# Altium PCB MasterBoard.PcbDoc (part 3 of 3)
Units mil, origin at the board's own origin, x right, y up, seen from the top; angles counter-clockwise.
Board outline 13400 x 7290 mil, 2 copper layers (Top Layer, Bottom Layer); 563 components, 331 nets, 1403 pads, 323 vias.
Unrouted connection lines stored in the file: 87.
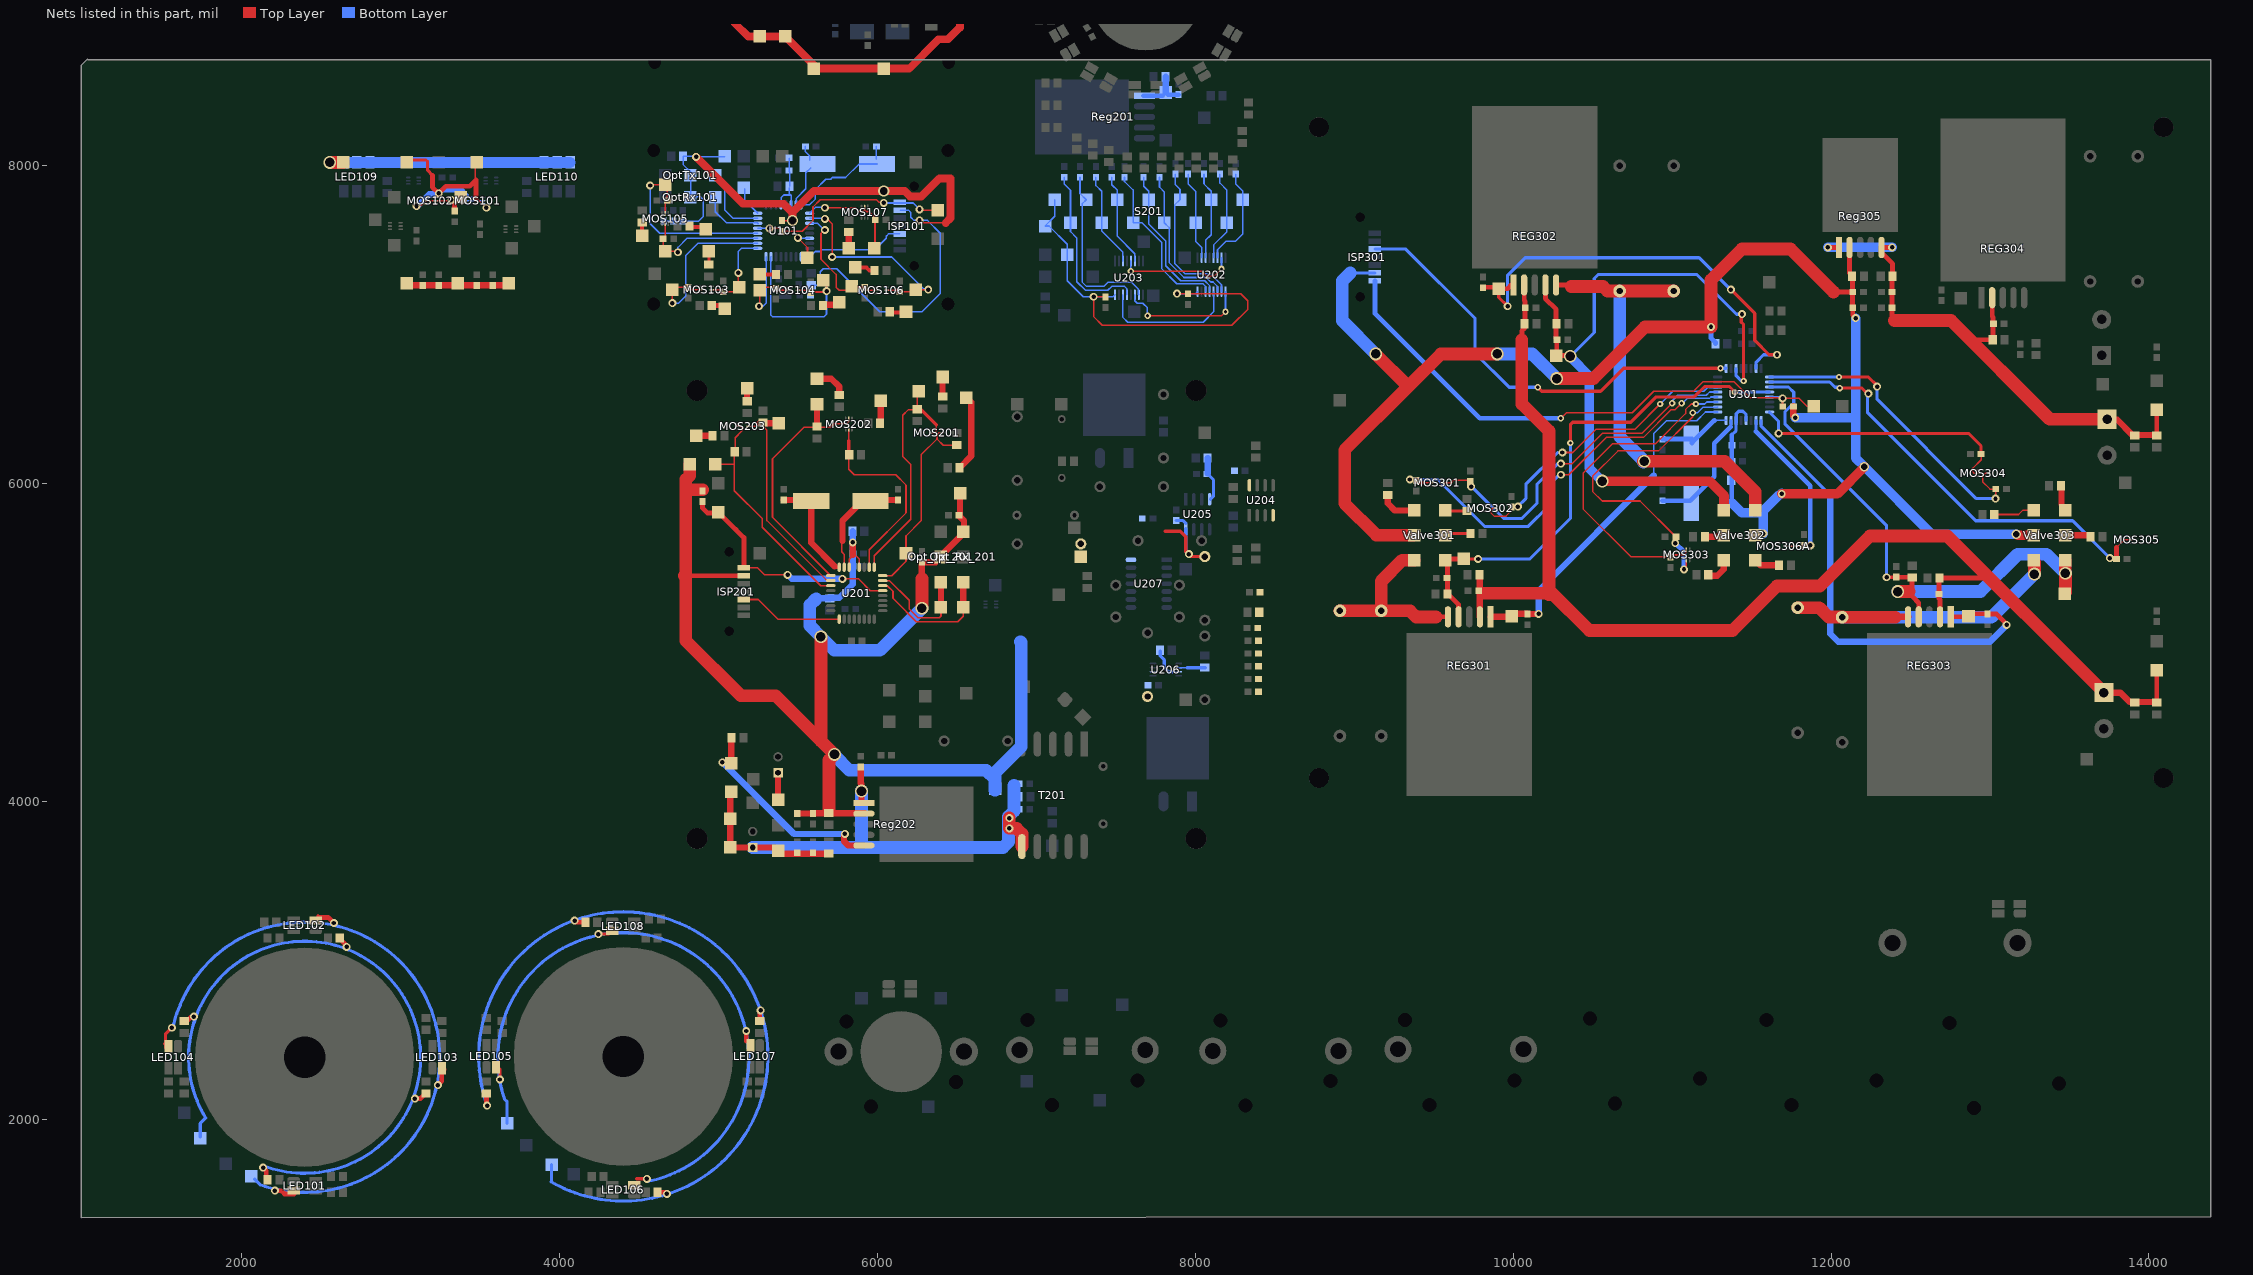
[diagram p3: the nets of this part, all layers, seen from the top]

## Via types
v1: diameter 50, hole 28, Top Layer to Bottom Layer, 217 vias
v2: diameter 80, hole 60, Top Layer to Bottom Layer, 55 vias
v3: diameter 40, hole 20, Top Layer to Bottom Layer, 25 vias
v4: diameter 70, hole 50, Top Layer to Bottom Layer, 11 vias
v5: diameter 145, hole 125, Top Layer to Bottom Layer, 8 vias
v6: diameter 80, hole 40, Top Layer to Bottom Layer, 2 vias
v7: diameter 60, hole 40, Top Layer to Bottom Layer, 2 vias
v8: diameter 50, hole 28, Top Layer to Bottom Layer, tented top, 1 vias
v9: diameter 100, hole 80, Top Layer to Bottom Layer, 1 vias
v10: diameter 100, hole 60, Top Layer to Bottom Layer, 1 vias

## Nets (pads, with @x,y where several pads share a name; then routed paths per layer and width w, separated by ;. In a path a pad name is that pad's centre, name@x,y a point inside that pad or via, vN(x,y) a via of type N, cw(c..) or ccw(c..) an arc to the next point about the centre after c; other vN are vias at no path point) (continued)
NetU202_7: U202.7 U203.5 | length 736.1
  Top Layer w10: v3(7595,7335) 8040,7335 8070,7305 8120,7305 v3(8165,7350)
  Bottom Layer w10: v3(7595,7335) U203.5@7595,7400 ; v3(8165,7350) U202.7@8165,7420
NetU202_9: U202.9 U203.11 | length 813.1
  Top Layer w10: v3(7700,7055) 8165,7055 v3(8190,7080)
  Bottom Layer w10: U203.11@7620,7187.4 7620,7150 7635.63,7134.37 7669.37,7134.37 7698.74,7105 7698.74,7056.26 v3(7700,7055) ; v3(8190,7080) U202.9@8190,7207.4
NetU202_12: U202.12 U203.14 | length 879.2
  Bottom Layer w10: U203.14@7545,7187.4 7545,7045 7575,7015 8050,7015 8115,7080 U202.12@8115,7207.4
NetValve101_4: Valve101.4 Valve102.1 | length 228
  Top Layer w40: Valve101.4@5031.65,9127.17 Valve102.1@5259.69,9127.17
NetValve102_2: Valve102.2 Valve103.2 | length 160
  Top Layer w50: Valve102.2@5260,8970 Valve103.2@5420,8970
ON/OFF201: R252.1 Reg202.5 S202.2 | length 1291.8
  Top Layer w40: S202.2@5080,4241.1 R252.1@5080,4400 ; v1@5790,3790 5790,3750 5817.72,3722.28 Reg202.5@5915,3722.28
  Bottom Layer w40: v1(5025,4245) 5475,3795 v1(5795,3795)
OPT_RX_101: OptRx101.1 U101.30 | length 391.1
  Bottom Layer w10: OptRx101.1@4980,7800 4980,7710 5050,7640 5245,7640 5247.19,7637.81 U101.30@5250,7635
OPT_RX_201: Opt_Rx_201.1 TP212.1 U201.30 | length 856.6
  Top Layer w10: U201.30@6033.39,5357.24 6062.76,5357.24 6097.91,5322.09 6097.91,5278.12 6117.91,5258.12 6117.91,5257.09 6245,5130 6505,5130 6540,5165 TP212.1@6540,5220 TP212.1@6540,5230
  Top Layer w40: TP212.1@6540,5230 Opt_Rx_201.1@6540,5380
OPT_TX_101: OptTx101.1 U101.31 | length 458.6
  Bottom Layer w10: OptTx101.1@4990,7930 5040,7880 5040,7720 5091.26,7668.74 U101.31@5246.61,7668.74
OPT_TX_201: Opt_Tx_201.1 TP218.1 U201.31 | length 709.8
  Top Layer w10: U201.31@6033.39,5388.74 6076.26,5388.74 6200,5265 6200,5210 6255,5155 6390,5155 6400,5165 TP218.1@6400,5215
  Top Layer w40: TP218.1@6400,5220 Opt_Tx_201.1@6400,5380
PGATE_201: R260.2 U206.6 | length 167.4
  Bottom Layer w10: U206.6@7896.42,4841.18 7948.82,4841.18
  Bottom Layer w20: 7948.82,4841.18 R260.2@8063.82,4841.18
R_CONTROL_101: I140.1 I143.1 MOS101.3 MOS101.6 MOS102.3 MOS102.6 | length 1565.1
  Top Layer w10: v1@3100,7750 3130,7750 ; MOS102.6@3153.07,7760 MOS102.6@3140,7760 ; MOS102.3@3220,7800 3240,7820 v1(3240,7825) ; I143.1@3470,8030 3470,8010 3470,7905 3470,7805 3475,7800 v1(3540,7735) ; 3130,7750 MOS102.6@3140,7760 ; 3130,7750 MOS102.6@3140,7760
  Top Layer w20: I140.1@3060,8035 3160,8035 3170,8025 3170,7970 3200,7940
  Top Layer w30: 3200,7940 3200,7865 v1(3240,7825) 3285,7870 3435,7870 3470,7905 3475,7910 3475,7800 ; I143.1@3470,8010 I143.1@3475,8015
  Bottom Layer w10: 3420,7815 3435,7800 MOS101.6@3453.07,7800
  Bottom Layer w20: 3390,7845 3420,7815
  Bottom Layer w30: v1(3240,7825) 3260,7845 3390,7845
  Bottom Layer w40: v1(3100,7745) 3105,7745 3180,7820 v1@3235,7820
R_CONTROL_101L: I115.1 R102.1 R103.1 R104.1 R117.1 | length 4519.3
  Top Layer w10: R102.1@2155,1630 R102.1@2165,1620
  Top Layer w30: R117.1@1640,2617.4 1654.76,2617.4 v1@1682.36,2645 ; v1@2130,1700 2155,1675 R102.1@2155,1630 ; R103.1@2613.46,3140 v1@2649.49,3103.98 ; v1(3090,2130) 3125,2130 R104.1@3160,2165
  Bottom Layer w20: I115.1@1740,1890 1740,1974.08 1774.13,2008.22 cw(c2396.34,2390) v1@2140.49,1706.3
  other v1: 2135,1695 1700,2645 2660,3085
R_CONTROL_101R: I117.1 R135.1 R136.1 R137.1 R138.1 | length 5484
  Top Layer w30: R135.1@3540,2166.54 3540,2095 v1@3545,2090 ; v1(4095,3250) 4105,3240 R138.1@4166.54,3240 ; R136.1@4613.46,1540 4670,1540 4677.5,1532.5 v1@4680,1530 ; R137.1@5260,2613.46 v1@5260,2680
  Bottom Layer w10: 3945.99,1607.12 3950,1611.12
  Bottom Layer w20: v1@3546.26,2083.64 cw(c4401.34,2395) 3945.99,1607.12 ; 3950,1611.12 I117.1@3950,1715
  other v1: 4675,1530 3545,2085 5265,2685
R_PWM_101: I129.1 U101.32 | length 188.6
  Bottom Layer w10: I129.1@5165,7855 5165,7781.85 U101.32@5246.61,7700.24
R_PWM_101A: I147.1 MOS101.2 MOS101.5 MOS102.2 MOS102.5 R110.2 | length 508.8
  Top Layer w10: MOS102.5@3153.07,7780 MOS102.2@3220,7780 3315,7780 v1(3320,7785) 3335,7785 3370,7785 I147.1@3380,7795
  Top Layer w30: v1@3335,7785 3340,7780 R110.2@3340,7713.46
  Bottom Layer w10: v1(3320,7785) 3325,7780 MOS101.5@3453.07,7780 MOS101.2@3520,7780
RESET101: ISP101.1 R128.1 S101.1 U101.29 | length 1300.2
  Top Layer w10: v1(5320,7605) 5381.54,7605 R128.1@5400,7586.54 5526.54,7586.54 5595,7655 5595,7740 5640.71,7785.71 5994.29,7785.71 6010,7770 v1@6040,7770 ; v1@6265,7720 S101.1@6380,7720
  Bottom Layer w10: U101.29@5246.61,7605.75 5319.25,7605.75 v1(5320,7605) ; v1(6040,7765) 6140,7765 6225,7765 v1(6265,7725) ; v1@6262.5,7722.5 v1@6265,7720
RESET201: ISP201.1 R277.1 S205.1 U201.29 | length 1503.4
  Top Layer w10: ISP201.1@5160,5470 5245,5470 5290,5425 v1(5435,5425) ; v1(5780,5400) 5881.5,5400 5955.75,5325.75 U201.29@6033.39,5325.75
  Top Layer w30: R277.1@4900,5886.54 4900,5845 4930,5815 S205.1@5005,5815 ; S205.1@5000,5820 5110,5710 5160,5660 ISP201.1@5160,5475
  Bottom Layer w40: v1(5435,5425) 5460,5400 v1(5780,5400)
RESET301: ISP301.1 R334.1 S301.1 U301.29 | length 3476.2
  Top Layer w10: v3(10300,6410) 10335,6445 10750,6445 10885,6580 11135,6580 11195,6640 11390,6640 11490,6540 v1@11690,6540 ; R334.1@11695,6490 v1(11695,6535) 11800,6535 11850,6485
  Bottom Layer w10: U301.29@11613.39,6544.25 11685.75,6544.25 v1(11695,6535)
  Bottom Layer w30: ISP301.1@9130,7275 9130,7070 9790,6410 v3@10295,6410
SCK101: ISP101.5 U101.17 | length 685.9
  Bottom Layer w10: U101.17@5520.24,7426.61 5575.05,7426.61 5608.2,7459.76 5638.5,7459.76 5650,7471.26 5982.83,7471.26 6055,7543.43 6055,7555 6070,7570 ISP101.5@6140,7570
SCK201: ISP201.5 U201.17 | length 651.8
  Top Layer w10: ISP201.5@5160,5270 5250,5270 5375,5145 5759.76,5145 U201.17@5760,5145
SCK301: ISP301.5 U301.17 | length 2769.7
  Top Layer w20: v3(10155,6605) 10180,6580 10550,6580 10695,6725 v3(11305,6725)
  Bottom Layer w20: ISP301.5@9130,7475 9325,7475 9760,7040 9760,6820 9975,6605 v3(10155,6605) ; v3(11305,6725) 11339.76,6725 U301.17@11340,6725
SMPSBENABLE_101: I124.1 U101.14 | length 221
  Top Layer w10: v1(5500,7545) 5560,7485 I124.1@5560,7420
  Bottom Layer w10: v1@5502.24,7542.76 U101.14@5573.39,7542.76
SMPSBENABLE_101B: I120.1 PWR102.3 TP119.1 | length 722.2
  Top Layer w40: TP119.1@5500,9490 I120.1@5660,9490 v1(5660,9235)
  Bottom Layer w10: 5866.18,9190 PWR102.3@5866.18,9260
  Bottom Layer w40: v1(5660,9235) 5720,9175 5851.18,9175 5866.18,9190
SW_201: R207.1 S201.5 U202.2 | length 561.7
  Bottom Layer w10: R207.1@7955,7946.54 7955,7885 8002.4,7837.6 S201.5@8002.4,7640 8002.4,7522.6 8040,7485 U202.2@8040,7420
SW_202: R203.1 S201.2 U202.5 | length 579.8
  Bottom Layer w10: U202.5@8115,7420 8115,7500 8199.25,7584.25 S201.2@8199.25,7640 8199.25,7845.75 8155,7890 R203.1@8155,7946.54
SW_203: R202.2 S201.7 U202.11 | length 960.9
  Bottom Layer w10: R202.2@7775,7926.54 7775,7865 7805.55,7834.45 S201.7@7805.55,7640 7835,7610.55 7835,7390 7929.13,7295.87 8069.13,7295.87 8097.5,7267.5 8112.16,7267.5 8140,7239.66 U202.11@8140,7207.4
SW_204: R206.2 S201.9 U202.14 | length 1060
  Bottom Layer w10: R206.2@7555,7926.54 7555,7900 7608.7,7846.3 S201.9@7608.7,7640 7665,7640 7790,7515 7790,7350 7884.13,7255.87 8049.13,7255.87 8065,7240 U202.14@8065,7207.4
SW_205: R205.1 S201.3 U202.3 | length 560.4
  Bottom Layer w10: R205.1@8055,7946.54 8055,7885 8100.83,7839.17 S201.3@8100.83,7785.67 8100.83,7565.83 8065,7530 U202.3@8065,7420
SW_206: R201.1 S201.1 U202.6 | length 644.7
  Bottom Layer w10: U202.6@8140,7420 8140,7470 8195,7525 8255,7525 8297.68,7567.68 S201.1@8297.68,7785.67 8297.68,7842.32 8255,7885 R201.1@8255,7946.54
SW_207: R209.1 S201.6 U202.10 | length 981.1
  Bottom Layer w10: R209.1@7875,7946.54 7875,7880 7903.98,7851.02 S201.6@7903.98,7785.67 7870,7751.69 7870,7385.05 7935.05,7320 8095,7320 8165,7250 U202.10@8165,7207.4
SW_208: R204.2 S201.8 U202.13 | length 978.9
  Bottom Layer w10: R204.2@7675,7926.54 7675,7870 7707.13,7837.87 S201.8@7707.13,7785.67 7707.13,7632.87 7815,7525 7815,7370 7909.13,7275.87 8059.13,7275.87 8090,7245 U202.13@8090,7207.4
SW_209: R210.2 S201.11 U203.3 | length 597
  Bottom Layer w10: R210.2@7375,7926.54 7375,7875 7411.85,7838.15 S201.11@7411.85,7640 7411.85,7588.15 7545,7455 U203.3@7545,7400
SW_210: R208.2 S201.10 U203.6 | length 586.6
  Bottom Layer w10: R208.2@7475,7926.54 7475,7880 7510.28,7844.72 S201.10@7510.28,7785.67 7510.28,7554.72 7620,7445 U203.6@7620,7400
SW_211: R244.2 S201.12 U203.10 | length 1113.9
  Bottom Layer w10: R244.2@7275,7926.54 7275,7824.09 S201.12@7313.43,7785.67 7290,7762.24 7290,7265 7315,7240 7425,7240 7450,7265 7599.66,7265 7641.24,7223.42 7641.24,7191.16 U203.10@7645,7187.4
SW_212: R245.1 S201.13 U203.13 | length 1081.6
  Bottom Layer w10: R245.1@7175,7926.54 7175,7885 7215,7845 S201.13@7215,7640 7215,7585 7255,7545 7255,7270 7310,7215 7450,7215 7475,7240 7555,7240 7570,7225 U203.13@7570,7187.4
VALVE+301: C303.2 C304.2 REG301.4 TP301.1 U301.28 Valve301.2 | length 3239
  Top Layer w20: TP301.1@9695,5525 v1(9780,5525) ; v3(10360,6255) 10360,6370 10375,6385 10740,6385 10900,6545 11140,6545 11205,6610 11360,6610 v3(11395,6575)
  Top Layer w30: C304.2@9587.4,5305 9587.4,5405 9587.4,5507.6 9575.45,5519.55 9575,5520 9580,5525 TP301.1@9690,5525 TP301.1@9695,5525 ; C304.2@9595,5300 9656.93,5238.07 REG301.4@9656.93,5161.06
  Bottom Layer w20: v1@9770,5525 v1(9780,5525) 10105,5525 10360,5780 v3@10360,6250 ; v3@11395.75,6575.75 U301.28@11613.39,6575.75
VALVE+302: C307.2 C308.2 REG302.4 TP303.1 U301.19 Valve302.2 | length 4428.9
  Top Layer w20: v1@11435,7065 11435,7015 11450,7000 v3(11450,6645)
  Top Layer w30: REG302.4@10203.07,7248.94 10203.07,7161.93 10270,7095 10270,7005 10270,6915 10275,6910 10275,6905 10275,6805 v2@10350,6805
  Top Layer w60: v2@10555,6015 v2(10560,6015) 11235,6015 11326.57,5923.43 Valve302.2@11326.57,5832.48
  Bottom Layer w20: v2@10365,6805 10510,6950 10510,7290 10535,7315 11155,7315 11405,7065 v1(11440,7065) ; U301.19@11402.76,6723.39 11402.76,6677.24 11435,6645 v3@11445,6645
  Bottom Layer w60: v2@10360,6795 10480,6675 10480,6095 v2(10560,6015)
  other v2: 10360,6800
VALVE+303: C311.2 C312.2 REG303.4 TP305.1 U301.27 Valve303.2 | length 3507.1
  Top Layer w20: v1(12350,5410) C311.2@12405,5410
  Top Layer w30: C311.2@12410,5410 12510,5410 C312.2@12510,5407.6 12510,5290 12551.93,5248.07 REG303.4@12551.93,5161.06
  Top Layer w80: v2@12425,5320 12490,5320 ; v2@13473.43,5436.57 Valve303.2@13473.43,5517.52 ; TP305.1@13475,5315 v2(13475,5435)
  Bottom Layer w20: U301.27@11613.39,6607.24 11732.76,6607.24 11765,6575 11765,6505 11710,6450 11710,6375 12350,5735 v1(12350,5410)
  Bottom Layer w80: v2(12420,5320) 12940,5320 13175,5555 13355,5555 v2(13475,5435)
VALVE-301: R301.1 R303.1 REG301.5 Valve301.1 | length 1142.5
  Top Layer w30: 9515,5161.06 REG301.5@9590,5161.06
  Top Layer w80: R303.1@8910,5198.7 R301.1@9170,5198.7 9351.3,5198.7 9390,5160 9515,5160 ; R301.1@9170,5200 9170,5385 9302.52,5517.52 Valve301.1@9376.57,5517.52
VALVE-302: R308.1 R309.1 REG302.5 Valve302.1 | length 2764.5
  Top Layer w30: REG302.5@10270,7248.94 10351.06,7248.94
  Top Layer w80: 10365,7240 10565,7240 10593.7,7211.3 R308.1@10670,7211.3 ; R308.1@10683.7,7211.3 R309.1@11010,7211.3 ; v2@10820,6140 v2(10825,6140) 11330,6140 11523.43,5946.57 Valve302.1@11523.43,5832.48
  Bottom Layer w80: R308.1@10670,7211.3 10670,6295 v2(10825,6140) v2@10820,6135
VALVE-303: R314.2 R315.2 REG303.5 Valve303.1 | length 2116.5
  Top Layer w40: 12408.94,5161.06 REG303.5@12485,5161.06
  Top Layer w80: R315.2@11790,5218.7 11926.3,5218.7 11985,5160 12070,5160 R314.2@12075,5160 ; R314.2@12070,5158.7 12403.7,5158.7 ; v2(13280,5430) Valve303.1@13280,5505
  Bottom Layer w80: R314.2@12070,5158.7 13008.7,5158.7 v2(13280,5430)
VALVE_B_101: I125.1 R106.1 | length 90
  Top Layer w20: R106.1@4940,7370 R106.1@4940,7377.4 I125.1@4940,7460
VALVE_B_101B: I107.1 Valve101.1 | length 306.7
  Top Layer w40: I107.1@4680,8950 4904.88,8950 Valve101.1@4962.76,9007.87
VALVE_B_102: I126.1 R116.1 | length 82.6
  Top Layer w25: R116.1@4830,7615 I126.1@4912.6,7615
VALVE_B_103: I128.1 R123.1 | length 100
  Top Layer w40: I128.1@5820,7480 R123.1@5820,7580
VALVE_B_201: I226.1 R247.1 | length 482.5
  Top Layer w10: I226.1@6560,6540 I226.1@6590,6510
  Top Layer w40: R247.1@6517.4,6100 6590,6172.6 I226.1@6590,6510
VALVE_B_202: I230.1 R254.1 | length 62.6
  Top Layer w40: R254.1@5180,6517.4 I230.1@5180,6580
VALVE_B_301: R317.1 Valve301.6 | length 137.6
  Top Layer w20: Valve301.6@9572.4,5827.6 9573.43,5827.6 R317.1@9710,5827.6
VALVE_B_302: R323.1 Valve302.6 | length 166.6
  Top Layer w40: R323.1@11230,5420 11285,5420 11325,5460 Valve302.6@11325,5515
VALVE_B_303: R329.1 Valve303.6 | length 162.2
  Top Layer w10: Valve303.6@13450,5870 13473.43,5846.57 Valve303.6@13473.43,5832.48
  Top Layer w40: Valve303.6@13450,5870 R329.1@13450,5985
VALVE_B_PWM_101: MOS103.2 R113.2 TP106.1 U101.26 | length 1093.1
  Top Layer w10: v1(4710,7135) TP106.1@4710,7220 ; TP106.1@4735,7235 4810,7235 4815,7235 4830,7220 MOS103.2@4890,7220
  Bottom Layer w10: v1@4705,7135 v1(4710,7135) 4750,7135 4795,7180 4795,7435 4871.26,7511.26 U101.26@5246.61,7511.26
VALVE_B_PWM_102: MOS105.2 R120.2 TP109.1 U101.28 | length 1205.4
  Top Layer w10: v1@4570,7880 TP109.1@4665,7880 ; MOS105.2@4665,7700 4665,7775 R120.2@4670,7780 ; R120.2@4678.46,7780 TP109.1@4678.46,7866.54
  Bottom Layer w10: v1(4570,7875) 4570,7635 4630.75,7574.25 U101.28@5246.61,7574.25
VALVE_B_PWM_103: MOS107.2 R126.2 TP113.1 U101.9 | length 666.8
  Top Layer w10: v1(5670,7735) 5860,7735 5883.78,7711.22 5908.28,7711.22 5920,7722.94 ; MOS107.2@5920,7740 5920,7722.94 ; TP113.1@5985,7485 R126.2@5985,7660 ; R126.2@5986.54,7660 5986.54,7673.46 5948.78,7711.22 5928.79,7711.22 5920,7720.01 ; 5920,7720.01 5920,7722.94 ; 5920,7720.01 5920,7722.94
  Bottom Layer w10: U101.9@5573.39,7700.24 5610,7736.85 v1@5663.15,7736.85
VALVE_B_PWM_201: MOS202.2 R251.2 U201.2 | length 1268.8
  Top Layer w10: R251.2@5820,6180 5820,6090 5855,6055 6115,6055 6180,5990 6180,5815 5948.74,5583.74 U201.2@5948.74,5473.39 ; 5820,6265 MOS202.2@5820,6340
  Top Layer w20: R251.2@5820,6180 5820,6265 5820,6270
VALVE_B_PWM_202: MOS203.2 R257.2 TP214.1 U201.11 | length 1463.2
  Top Layer w10: TP214.1@4980,6120 5100,6120 ; R257.2@5100,6220 5100,6120 ; R257.2@5105,6210 5105,6220 5105,6287.94 5148.78,6331.72 5148.78,6351.22 5140,6360 MOS203.2@5120,6360 ; U201.11@5706.61,5357.24 5642.76,5357.24 5275,5725 5275,5780 5100,5955 5100,6120
VALVE_B_PWM_301: MOS301.5 R320.2 U301.13 | length 2245.7
  Top Layer w10: MOS301.5@9556.93,6005 9610,6005 9625,6020 R320.2@9725,6020 ; v1(10300,6125) 10370,6125 10560,6315 10810,6315 v3(11000,6505)
  Bottom Layer w10: v3@10995,6510 10995,6515 11035,6555 11215,6555 11235.75,6575.75 U301.13@11286.61,6575.75
  Bottom Layer w20: 9725,6010 9725,5995 9737.5,5982.5 9940,5780 10055,5780 10150,5875 10150,5995 10280,6125 v1(10300,6125)
  other v1: 9735,5980
VALVE_B_PWM_302: MOS303.2 R326.2 U301.11 | length 2065.5
  Top Layer w10: R326.2@10985,5550 10990,5550 11072.06,5550 11090,5567.94 MOS303.2@11090,5585 ; R326.2@10990,5540 10740,5540 10440,5840 10440,6065 10625,6250 10895,6250 11085,6440 11085,6465 11120,6500 v3@11145,6500
  Bottom Layer w10: v3@11155,6500 11205,6500 11217.76,6512.76 U301.11@11286.61,6512.76
  other v3: 11150,6500
VALVE_B_PWM_303: MOS304.5 R332.2 U301.32 | length 1688.2
  Top Layer w10: MOS304.5@12923.07,6065 12900,6065 12890,6075 12890,6095 12945,6150 R332.2@12945,6185 ; R332.2@12940,6185 R332.2@12941.73,6183.27
  Top Layer w20: v1(11670,6315) 12865,6315 12943.46,6236.54 R332.2@12943.46,6185
  Bottom Layer w20: U301.32@11613.39,6449.76 11613.39,6446.61 11670,6390 v1(11670,6315)
VALVE_G_101: I136.1 R105.1 | length 90
  Top Layer w25: I136.1@5260,7315 R105.1@5350,7315
VALVE_G_101B: I119.1 Valve101.3 | length 211
  Top Layer w40: I119.1@4682.83,9127.17 Valve101.3@4893.86,9127.17
VALVE_G_102: I137.1 R115.1 | length 80
  Top Layer w25: I137.1@4520,7565 R115.1@4520,7642.6 R115.1@4520,7645
VALVE_G_103: I127.1 R122.1 | length 92.6
  Top Layer w25: R122.1@6070,7075 6077.4,7075 I127.1@6162.6,7075
VALVE_G_201: I224.1 R246.1 | length 112.6
  Top Layer w40: R246.1@6410,6547.4 I224.1@6410,6660
VALVE_G_202: I229.1 R253.1 | length 135
  Top Layer w40: R253.1@6020,6385 I229.1@6020,6520
VALVE_G_301: R316.1 Valve301.5 | length 241.2
  Top Layer w40: R316.1@9210,5927.6 9210,5875 9255,5830 9376.57,5830 Valve301.5@9380,5830
VALVE_G_302: R322.1 Valve302.5 | length 165
  Top Layer w40: Valve302.5@11523.43,5517.52 11555.94,5485 R322.1@11672.6,5485 R322.1@11675,5485
VALVE_G_303: R328.1 Valve303.5 | length 258
  Top Layer w10: R328.1@13030,5805 13180,5805 13207.48,5832.48 Valve303.5@13276.57,5832.48
VALVE_G_PWM_101: MOS104.5 R112.2 TP105.1 U101.24 | length 621.2
  Top Layer w10: TP105.1@5250,7235 5260,7235 5345,7235 5355.77,7224.23 5365,7215 MOS104.5@5433.07,7215 ; v1@5260,7130 TP105.1@5260,7215
  Bottom Layer w10: v1(5255,7115) 5280,7115 5299.76,7134.76 U101.24@5299.76,7426.61
VALVE_G_PWM_102: MOS105.5 R119.2 TP108.1 U101.27 | length 817.2
  Top Layer w10: TP108.1@4651.54,7448.46 4651.54,7460 R119.2@4651.54,7540 ; R119.2@4660,7545 4665,7550 MOS105.5@4665,7633.07 ; TP108.1@4665,7460 v1@4740,7460
  Bottom Layer w10: v1@4745,7450 v1(4745,7455) 4745,7485 4802.76,7542.76 U101.27@5246.61,7542.76
VALVE_G_PWM_103: MOS106.5 R125.2 TP112.1 U101.10 | length 1324.7
  Top Layer w10: v1(5670,7665) 5685,7665 5715,7635 v1(5715,7425) v1@5715,7415 ; MOS106.5@6056.93,7215 R125.2@6130,7215 ; R125.2@6140,7206.54 TP112.1@6238.46,7206.54 ; TP112.1@6240,7220 v1(6320,7220) v1@6330,7220
  Bottom Layer w10: U101.10@5573.39,7668.74 v1@5666.26,7668.74 ; v1@5715,7430 v1(5715,7425) 6090,7425 6290,7225 v1@6320,7225
VALVE_G_PWM_201: MOS201.2 R249.2 TP209.1 U201.1 | length 1520.5
  Top Layer w10: U201.1@5980.24,5473.39 5980.24,5545.24 6210,5775 6210,6120 6160,6170 6160,6430 6195,6465 R249.2@6250,6465 ; TP209.1@6250,6575 R249.2@6250,6467.4 R249.2@6250,6465 ; R249.2@6275,6465 R249.2@6250,6465 ; MOS201.2@6340,6320 6359.99,6320 6370,6330.01 6370,6370
  Top Layer w20: R249.2@6275,6465 6370,6370
VALVE_G_PWM_202: MOS203.5 R258.2 TP215.1 U201.10 | length 1386.3
  Top Layer w10: MOS203.5@5186.93,6360 5235,6360 R258.2@5255,6380 ; R258.2@5260,6380 5305,6335 5305,5767.03 5676.64,5395.39 5699.96,5395.39 U201.10@5706.61,5388.74
  Top Layer w40: R258.2@5260,6380 TP215.1@5380,6380
VALVE_G_PWM_301: MOS301.2 R319.2 U301.12 | length 2568.4
  Top Layer w10: 9435,6005 MOS301.2@9490,6005 ; v1(10300,6055) 10350,6055 10585,6290 10820,6290 10995,6465 11020,6465 v3(11060,6505)
  Top Layer w20: R319.2@9390,6025 9393.27,6021.73 9410,6005 9435,6005
  Bottom Layer w10: v3@11060,6510 11070,6510 11095,6535 11235,6535 11244.25,6544.25 U301.12@11286.61,6544.25
  Bottom Layer w20: v1(9350,6025) 9525,6025 9820,5730 10095,5730 10220,5855 10220,5985 v1@10290,6055
VALVE_G_PWM_302: MOS306A.5 R325.2 U301.2 | length 1028.1
  Top Layer w10: MOS306A.5@11736.93,5605 11830,5605 11833.27,5608.27 R325.2@11835,5610
  Bottom Layer w20: 11528.74,6326.26 U301.2@11528.74,6396.61
  Bottom Layer w30: 11528.74,6326.26 11870,5985 v1(11870,5610)
VALVE_G_PWM_303: MOS304.2 R331.2 U301.25 | length 2019.4
  Top Layer w10: MOS304.2@12990,6065 12970,6065 12955,6050 12955,6010 13000,5965 R331.2@13035,5965 ; v1@13036.54,5908.46 R331.2@13036.54,5965
  Top Layer w20: v3(12050,6670) 12235,6670 v1@12290,6615
  Bottom Layer w20: U301.25@11613.39,6670.24 v3@12049.76,6670.24 ; v1(12290,6610) 12290,6530 12915,5905 v1(13035,5905)
VALVE_R_101: I134.1 R107.1 | length 95
  Top Layer w40: R107.1@5660,7125 I134.1@5755,7125
VALVE_R_101B: I108.1 Valve101.5 | length 309.1
  Top Layer w10: Valve101.5@4943.54,9246.46 Valve101.5@4962.76,9246.46
  Top Layer w40: I108.1@4680,9310 4880,9310 Valve101.5@4943.54,9246.46
VALVE_R_102: I135.1 R118.1 | length 72.6
  Top Layer w30: R118.1@4957.4,7120 I135.1@5030,7120
VALVE_R_103: I102.1 R124.1 | length 133.3
  Top Layer w25: I102.1@5860,7360 5930,7360 5950,7340 R124.1@5982.6,7340 R124.1@5985,7340
VALVE_R_201: I231.1 R248.1 | length 210.7
  Top Layer w40: I231.1@5620,6660 5710,6660 5760,6610 R248.1@5760,6560
VALVE_R_202: I227.1 R255.1 | length 100
  Top Layer w40: I227.1@4860,6300 R255.1@4960,6300
VALVE_R_301: R318.1 Valve301.4 | length 152.6
  Top Layer w20: Valve301.4@9580,5685 R318.1@9732.6,5685
VALVE_R_302: R324.1 Valve302.4 | length 107.6
  Top Layer w40: R324.1@11207.4,5665 Valve302.4@11315,5665
VALVE_R_303: R330.1 Valve303.4 | length 156.6
  Top Layer w40: Valve303.4@13473.43,5675 R330.1@13630,5675
VALVE_R_PWM_101: MOS104.2 R114.2 TP107.1 U101.23 | length 1231.7
  Top Layer w10: MOS104.2@5500,7215 5575,7215 5584.23,7205.77 5585,7205 5680,7205 v1@5690,7205 ; v1@5680,7215 5680,7280 TP107.1@5680,7295
  Bottom Layer w10: U101.23@5331.26,7426.61 5329.88,7425.24 5329.88,7060.12 5340,7050 5665,7050 5680,7065 v1(5680,7210) 5680,7295
VALVE_R_PWM_102: MOS103.5 R121.2 TP110.1 U101.25 | length 521.4
  Top Layer w10: MOS103.5@4956.93,7220 R121.2@5020,7220 ; R121.2@5030,7206.54 5111.54,7206.54 TP110.1@5120,7215 ; TP110.1@5125,7235 v1@5125,7320
  Bottom Layer w10: v1@5125,7310 v1(5125,7325) 5125,7460 5144.76,7479.76 U101.25@5246.61,7479.76
VALVE_R_PWM_103: MOS106.2 R127.2 TP114.1 U101.11 | length 757.6
  Top Layer w10: v1@5660,7590 5645,7575 5645,7410 5740,7315 5740,7235 5760,7215 TP114.1@5810,7215 ; TP114.1@5821.54,7233.46 5840,7233.46 R127.2@5920,7233.46 ; R127.2@5925,7230 5940,7215 MOS106.2@5990,7215
  Bottom Layer w10: U101.11@5573.39,7637.24 5622.76,7637.24 v1@5665,7595
  other v1: 5670,7595
VALVE_R_PWM_201: MOS201.5 R250.2 TP210.1 U201.32 | length 1240.3
  Top Layer w10: U201.32@6033.39,5420.24 6090.24,5420.24 6180,5510 TP210.1@6180,5560 6180,5670 6275,5765 6275,6180 6375,6280 ; MOS201.5@6406.93,6320 6388.28,6320 6375,6306.72 6375,6280 ; R250.2@6500,6240 6415,6240 6375,6280
VALVE_R_PWM_202: MOS202.5 R256.2 TP213.1 U201.9 | length 1626
  Top Layer w10: U201.9@5706.61,5420.24 5340,5786.85 5340,6155 5540,6355 5620,6355 5705,6355 5725,6375 5805.13,6375 5820,6389.87 MOS202.5@5820,6400 ; MOS202.5@5820,6405 MOS202.5@5820,6400 ; MOS202.5@5820,6406.93 MOS202.5@5820,6400
  Top Layer w40: R256.2@5620,6360 TP213.1@5620,6500
VALVE_R_PWM_301: MOS302.2 R321.2 U301.14 | length 1831.5
  Top Layer w10: MOS302.2@9890,5845 9870,5845 9860,5835 9860,5815 9880,5795 9955,5795 9990,5830 R321.2@9990,5850 ; v1(10310,6195) 10375,6195 10520,6340 10765,6340 10932.5,6507.5 v3@10932.5,6512.5
  Bottom Layer w10: v3@10925.62,6500.62 11005,6580 11200,6580 11230,6610
  Bottom Layer w20: v1(10030,5855) 10080,5905 10080,5995 10280,6195 ; 11232.24,6607.24 U301.14@11286.61,6607.24
  other v3: 10925,6500
VALVE_R_PWM_302: MOS303.5 R327.2 U301.10 | length 1960.5
  Top Layer w10: R327.2@11020,5660 R327.2@11020,5665 ; R327.2@11023.46,5665 10798.46,5890 10560,5890 10500,5950 10500,6045 10660,6205 10915,6205 11130,6420 v3@11130,6440 ; v1(11075,5460) 11090,5475 MOS303.5@11090,5518.07
  Bottom Layer w10: v3@11135,6445 11160,6445 11195,6480 11285.35,6480 U301.10@11286.61,6481.26
  Bottom Layer w30: v1(11020,5625) 11075,5570 v1@11075,5465
  other v3: 11130,6445
VALVE_R_PWM_303: MOS305.2 R333.2 U301.26 | length 2854.2
  Top Layer w10: 13796.54,5596.54 13845,5645 MOS305.2@13890,5645
  Top Layer w20: v3(12055,6600) 12195,6600 v1@12230,6565
  Top Layer w30: R333.2@13796.54,5525 13796.54,5596.54
  Bottom Layer w20: U301.26@11613.39,6638.74 11991.26,6638.74 12025,6605 v3@12055,6605 ; v1@12230,6565 12230,6445 12910,5765 13520,5765 v1(13755,5530)
  other v1: 12235,6565
VALVEEN301: R302.2 REG301.1 TP302.1 U301.9 | length 2200.8
  Top Layer w40: REG301.1@9857.72,5161.06 9990,5161.06 TP302.1@9991.06,5161.06 ; TP302.1@9990,5165 10005,5180 R302.2@10090,5180 ; R302.2@10090,5178.46 v1@10158.46,5178.46
  Bottom Layer w10: 10885,6050 10885,6315 10965,6395 11155,6395 11209.76,6449.76 U301.9@11286.61,6449.76
  Bottom Layer w40: v1(10160,5180) 10160,5325 10885,6050
VALVEEN302: R310.2 REG302.1 TP304.1 U301.23 | length 2805.6
  Top Layer w20: TP304.1@9910,7220 9910,7170 v1(9965,7115) ; v1@11375,7215 11520,7070 11520,6900 11610,6810 v1(11660,6810)
  Top Layer w30: R310.2@9810,7235 9885,7235 9895,7225 TP304.1@9910,7225 9965,7225 9988.94,7248.94 REG302.1@10002.28,7248.94
  Bottom Layer w20: v1(9965,7115) 9965,7310 10075,7420 11170,7420 v1(11370,7220) ; U301.23@11528.74,6723.39 11528.74,6763.74 11575,6810 v1(11660,6810)
VALVEEN303: R312.2 REG303.1 TP306.1 U301.1 | length 3082.3
  Top Layer w30: REG303.1@12752.72,5161.06 12865,5161.06 12866.06,5161.06 12867.5,5162.5 12885,5180 R312.2@12985,5180 ; R312.2@12985,5178.46 13041.54,5178.46 v1@13105,5115
  Bottom Layer w20: U301.1@11560.24,6396.61 11560.24,6359.76 11995,5925
  Bottom Layer w40: 11995,5925 11995,5055 12045,5005 13000,5005 v1(13105,5110)
VBATT201: Batt201.1 C219.1 C221.1 C222.1 C223.2 C224.2 C225.2 I223.1 I232.1 R263.1 Reg202.1 S202.1 T201.6 TP221.1 | length 3814
  Top Layer w40: TP221.1@5075,3900 TP221.1@5075,3890 ; S202.1@5075,4055 TP221.1@5075,3890 ; C225.2@5700,3670 5695,3670 5595,3670 5495,3670 5390,3670 5372.5,3687.5 5350,3710 Batt201.1@5215,3710 I223.1@5075,3710 TP221.1@5075,3890 ; R263.1@5895,4212.6 5895,4115 5900,4110 v2(5900,4065) Reg202.1@5900,3995
  Top Layer w80: v1(6830,3895) v1(6830,3830) 6875,3830 6909.45,3795.55 T201.6@6909.45,3715.91
  Bottom Layer w40: 5875,3710 5900,3735
  Bottom Layer w80: Batt201.1@5215,3710 5875,3710 6790,3710 6825,3745 6825,3830 6825,3895 6825,3905 6860,3940 6860,3950 6860,4030 6860,4100 ; 5900,3735 v2(5900,4065)
VBATT201A: C239.1 C244.1 I211.1 Reg201.1 | length 314.8
  Bottom Layer w10: I211.1@7795,8440 I211.1@7815,8460
  Bottom Layer w30: Reg201.1@7675,8440 I211.1@7795,8440 ; I211.1@7828.46,8446.54 C239.1@7895,8446.54
  Bottom Layer w40: I211.1@7815,8460 C244.1@7815,8560
VBATT_INPUT201: BT201.1 I233.1 | length 170
  Top Layer w40: I233.1@5375,4010 BT201.1@5375,4180
VCC101: C102.2 C104.2 C105.2 C106.2 C109.2 C126.2 C127.2 C128.2 I133.1 ISP101.2 L101.2 OptRx101.2 OptTx101.2 R128.2 U101.4 U101.6 | length 5745
  Top Layer w10: R128.2@5400,7653.46 v4@5463.46,7653.46 ; v1@6255,7655 v1(6265,7655) 6275,7655 6290,7640 6430,7640
  Top Layer w50: v1(4860,8055) 5155,7760 5410,7760 5465,7705 ; v4(5465,7655) 5465,7705 ; 6430,7640 6460,7670 6460,7920 6390,7920 6276,7806 6206.08,7806 6172.08,7840 v4(6040,7840) 5600,7840 5465,7705
  Bottom Layer w10: C127.2@4655,7651.54 4713.46,7651.54 4714.23,7650.77 4715,7650 4775,7650 4875,7650 4905,7680 4905,7785 4885,7805 OptRx101.2@4830,7805 ; OptRx101.2@4830,7810 4825,7815 4825,7940 4825,7960 4777.4,8007.6 C126.2@4777.4,8060 v1@4855,8060 ; v1(4860,8055) I133.1@5040,8055 ; U101.4@5394.25,7753.39 5394.25,7799.25 5410,7815 5455,7815 ; C104.2@5445,7860 5445,7825 5455,7815 ; C105.2@5445,8045 5445,7970 5445,7965 5447.4,7962.6 C104.2@5447.4,7870 ; v4@5465,7660 5457.24,7667.76 U101.6@5457.24,7753.39 5457.24,7812.76 5455,7815 ; C128.2@5578.46,7185 5578.46,7233.46 L101.2@5585,7240 ; L101.2@5585,7247.6 5622.6,7247.6 5640,7265 5640,7331.57 5660,7351.57 5743.43,7351.57 6015,7080 6280,7080 6395,7195 6395,7575 6315,7655 v1(6265,7655) 6230,7655 6210,7675 6210,7705 6195,7720 ISP101.2@6145,7720
VCC101A: I144.1 LED109.1 LED110.1 | length 1590
  Top Layer w80: v2@2560,8020 I144.1@2640,8020
  Bottom Layer w70: v2(2555,8020) 2642.32,8020 2725,8020 2807.68,8020 3902.32,8020 3985,8020 LED110.1@4065,8020
VCC101B: C112.2 C113.2 D101.1 I121.1 I150.1 R129.2 TP118.1 Valve101.2 Valve102.3 Valve103.3 | length 2599.7
  Top Layer w10: I121.1@5600,8610 I121.1@5600,8632.52
  Top Layer w30: C112.2@6330,9097.4 6330,9173.46 R129.2@6340,9183.46
  Top Layer w50: Valve101.2@5100.55,9007.87 5100.55,8899.45 5187.48,8812.52 Valve102.3@5260,8812.52 Valve103.3@5420,8812.52 I121.1@5600,8632.52 ; I121.1@5600,8610 6200,8610 6385,8795 6445,8795 6520,8870 TP118.1@6520,9290 6465,9290 6445,9310 D101.1@6380,9310 ; C112.2@6340,9087.4 C113.2@6440,9087.4 6512.6,9087.4
VCC102A: C122.2 C123.2 C124.2 C125.2 I109.1 I139.1 I145.1 | length 636.9
  Top Layer w40: I139.1@3046.54,7246.54 C125.2@3140,7246.54 C123.2@3240,7246.54 3360,7246.54 C122.2@3480,7246.54 C124.2@3580,7246.54 3680,7246.54 I109.1@3683.46,7246.54
VCC102B: C116.2 C117.2 D102.1 I123.1 R130.2 TP116.1 | length 824.9
  Top Layer w50: v10(6405,9430) 6425,9410 I123.1@6520,9410
  Bottom Layer w30: R130.2@6068.46,9220 6105,9220 6155,9170 D102.1@6155,9100 6240,9100 6312.4,9172.4 C117.2@6312.4,9220
  Bottom Layer w50: C117.2@6312.4,9220 C116.2@6312.4,9360 6312.4,9407.4 6335,9430 v10(6405,9430)
VCC102L: I111.1 LED101.2 LED102.2 LED103.2 LED104.2 | length 4713.4
  Top Layer w20: LED104.2@1515,2475 LED104.2@1519.68,2479.68 ; LED104.2@1520,2450 1520,2535 v1(1560.47,2575.47) ; 2480,3280 LED102.2@2487.85,3272.15 ; LED103.2@3272.82,2307.82 LED103.2@3280,2315
  Top Layer w30: v1(2209.53,1550.47) 2249.53,1550.47 2270,1530 2327.44,1530 LED101.2@2330,1530 ; LED102.2@2465.24,3249.53 2485.71,3270 2545,3270 v1@2580,3235 ; v1@3235,2215 3259.53,2239.53 LED103.2@3259.53,2321.1
  Bottom Layer w20: v1@1565.81,2570.91 cw(c2396.34,2390) 2196.07,1563.93 cw(c2396.34,2390) 2117.45,1587.05 I111.1@2080,1624.5
  other v1: 3234.53,2214.53 2580.47,3234.53
VCC102R: I113.1 LED105.2 LED106.2 LED107.2 LED108.2 | length 4290.8
  Top Layer w10: LED107.2@5175,2489.37 LED107.2@5200.47,2463.9
  Top Layer w20: v1(3625,2250) LED105.2@3625,2315.63 ; v1(4245,3165) LED108.2@4310.63,3165 ; 4484.37,1625 v1(4550,1625)
  Top Layer w30: LED107.2@5175,2490 v1(5175,2555)
  Bottom Layer w10: 3653.73,2126.27 3653.73,2128.34
  Bottom Layer w20: 3653.73,2126.27 3670,2110 I113.1@3670,1975 ; 3653.73,2128.34 cw(c4401.34,2383.65) v1@4550.41,1607.84
VCC201: C205.2 C206.2 C207.2 C210.2 C214.2 C218.1 C220.1 C226.2 C227.2 C228.2 C234.1 C235.1 C236.1 C237.1 C238.1 C242.1 C243.1 C299.1 I201.1 I225.1 I228.1 ISP201.2 L201.2 Opt_Rx_201.3 Opt_Tx_201.2 R266.2 R267.1 R268.1 R269.2 R270.2 R277.2 Reg202.2 U201.4 U201.6 U204.4 U204.8 U205.4 U205.8 U206.7 U207.14 | length 10402.1
  Top Layer w10: U201.6@5822.76,5473.39 5822.76,5522.76 5845,5545 5865,5545 5885,5525 U201.4@5885,5475
  Top Layer w20: 7810,5700 7905,5700 7940,5665 7940,5570 7970,5540 R266.2@8080,5540
  Top Layer w30: 4795,5420 ISP201.2@5160,5420
  Top Layer w40: C228.2@5495,3923.46 C227.2@5593.46,3923.46 ; C227.2@5595,3925 5695,3925 5915,3925 Reg202.2@5920,3925 ; 5845,5550 v1(5845,5630) ; 6280,5400 6280,5505 6367.52,5505 Opt_Tx_201.2@6400,5537.48 6400,5545 6544.98,5689.98 6545,5694.96 6545,5765 C210.2@6515,5795 ; C210.2@6520,5800 I225.1@6520,5940
  Top Layer w80: 4785,5420 4795,5420 ; I228.1@4820,6120 4820,6050 4795,6025 4795,5960 ; R277.2@4900,5960 4795,5960 ; v2(5645,5035) 5645,4380 ; C226.2@5695,3945 5695,4260 v2(5730,4295) 5645,4380 ; v2(6280,5215) 6280,5400 ; 4795,5420 4795,5960 ; 4795,5420 4795,5010 5140,4665 5360,4665 5645,4380
  Bottom Layer w10: 7855.59,4815.59 U206.7@7896.42,4815.59
  Bottom Layer w20: C234.1@7780,4945 7780,4915 7805,4890 7805,4840 7829.41,4815.59 7855.59,4815.59 ; C299.1@7880,5766.54 7923.46,5766.54 U205.8@7940,5750 ; U205.8@7940,5715 7940,5570 7970,5540 R266.2@8060,5540 ; R270.2@8077.4,6060 8115,6022.4 8115,5920 U205.4@8095,5900
  Bottom Layer w40: 5617.6,5277.4 L201.2@5700,5277.4 ; L201.2@5700,5280 5760,5280 5845,5365 5845,5480 5845,5560 v1(5845,5630) C205.2@5845,5700 ; R270.2@8077.4,6062.6 R268.1@8077.4,6160
  Bottom Layer w80: 5615,5275 5575,5235 5575,5105 v2(5645,5035) 5730,4950 6015,4950 v2(6280,5215) ; v2@5730,4290 5825,4195 6685,4195 6740,4140 ; I201.1@6740,4070 I201.1@6740,4080 6740,4140 ; 6900,5005 6905,5000 6905,4344.79 6740,4179.79 6740,4140
  other v1: 7960,5555
VCC201A: C212.1 C215.2 I209.1 S201.14 S203.1 U202.16 U203.16 | length 2839.6
  Top Layer w10: C212.1@7433.46,7175 v1(7360,7175) 7360,7050 7415,6995 8230,6995 8330,7095 8330,7150 8286.54,7193.46 C215.2@7955,7193.46 ; v1(7885,7195) C215.2@7953.46,7195
  Bottom Layer w10: S201.14@7116.57,7785.67 7116.57,7681.57 S203.1@7055,7620 7080,7620 7195,7505 I209.1@7195,7440 7195,7275 7295,7175 v1(7360,7175) 7482.6,7175 U203.16@7495,7187.4 ; v1(7885,7195) 8002.6,7195 U202.16@8015,7207.4
VCC301: C319.2 C320.2 C321.2 C327.2 C328.2 C329.2 ISP301.2 L301.2 R334.2 Reg305.2 U301.4 U301.6 Valve301.3 Valve302.3 Valve303.3 | length 11091.4
  Top Layer w30: 12015,7205 C328.2@12135,7205 ; Reg305.2@12116.93,7485 12116.93,7323.07 12133.8,7306.2 12135,7305 C328.2@12135,7205 ; C329.2@12135,7105 C328.2@12135,7205 ; C329.2@12136.54,7105 12136.54,7058.46 v1(12155,7040) ; C328.2@12136.54,7205 C328.2@12135,7205
  Top Layer w40: R334.2@11763.46,6485 11763.46,6426.54 v1(11775,6415)
  Top Layer w60: v1(11690,5935) 12040,5935 v7(12210,6105) ; v7@13175,5675 Valve303.3@13276.57,5675
  Top Layer w80: v2(9135,6815) 9340,6610 ; Valve301.3@9370,5675 9140,5675 8940,5875 8940,6210 9340,6610 ; v2(9900,6815) 9545,6815 9340,6610 ; v2(10275,6660) 10505,6660 10830,6985 v1(11245,6985) 11245,7280 11440,7475 11745,7475 12015,7205
  Bottom Layer w20: 8975,7325 ISP301.2@9130,7325 ; 11375,6305 11402.76,6332.76 U301.6@11402.76,6396.61 ; U301.6@11404.25,6385 11404.25,6396.61 11404.25,6439.25 11420,6455 11445,6455 11465.75,6434.25 U301.4@11465.75,6396.61
  Bottom Layer w30: v1(11245,6985) 11245,6915 11272.6,6887.4 L301.2@11272.6,6880 ; 11375,5880 11375,6020 11375,6140 11375,6240 11375,6305
  Bottom Layer w60: 11375,5880 11440,5815 11575,5815 ; v1(11575,5685) 11575,5815 ; v1@11690,5940 v1(11690,5935) 11670,5925 11575,5830 11575,5815 ; v1(11775,6415) 12155,6415 ; v1(12155,7040) 12155,6415 ; v7@13170,5680 v7(13165,5680) 12635,5680 v7(12210,6105) 12155,6160 12155,6415
  Bottom Layer w80: 8975,7325 8925,7275 8925,7025 v2(9135,6815) ; v2(9900,6815) 10120,6815 v2(10275,6660)
VFB_201: C229.2 R263b.1 R264.1 TP222.1 U206.2
VIN33V3: C301.2 C302.2 C305.2 C306.2 C309.2 C310.2 C332.2 C333.2 LED302.1 P302.1 REG301.2 REG302.2 REG303.2 | length 8013
  Top Layer w30: 10055,6905 10055,6960 10072.6,6977.6 C306.2@10072.6,7005 ; REG302.2@10069.21,7248.94 10069.21,7150.79 10075,7145 10075,7105 C306.2@10075,7010 ; C310.2@12680,5395 12680,5305 12680,5275 12685.79,5269.21 REG303.2@12685.79,5161.06 ; C310.2@12682.4,5405 12985,5405 12990,5410 ; C333.2@14050,4625 LED302.1@14050,4820
  Top Layer w40: C302.2@9790,5425 9790.79,5424.21 9790.79,5325 REG301.2@9790.79,5161.06 ; P302.1@13717.24,4684.06 13820.94,4684.06 13880,4625 13910,4625 C333.2@14050,4625
  Top Layer w80: 9820,5310 10225,5310 ; 10055,6905 10055,6500 10225,6330 ; 10225,5300 10225,5310 ; 10225,6320 10225,5310 ; 10240,5315 10480,5075 11380,5075 11660,5355 11930,5355 12245,5670 12731.3,5670 P302.1@13717.24,4684.06
VIN301: C313.2 C314.2 C324.2 C325.2 C326.2 C330.2 C331.2 LED301.1 P301.1 REG304.2 Reg305.1 Reg305.5 | length 3532.5
  Top Layer w30: v1(11980,7485) Reg305.1@12050,7485 ; Reg305.5@12315,7490 12315,7485 12315,7455 12387.4,7382.6 C326.2@12387.4,7305 ; Reg305.5@12317.72,7485 v1(12385,7485) ; C326.2@12383.46,7291.54 C325.2@12383.46,7205 C324.2@12383.46,7105 12383.46,7056.54 12405,7035 ; 12885,6900 12890,6905 C314.2@13017.6,6905 ; REG304.2@13014.21,7168.94 13014.21,7050.79 13020,7045 13020,7005 C314.2@13020,6905 ; C331.2@14050,6305 LED301.1@14050,6465
  Top Layer w40: P301.1@13740,6400 13800,6400 13895,6305 13910,6305 C331.2@14050,6305
  Top Layer w80: 12400,7025 12755,7025 13375.94,6404.06 P301.1@13737.24,6404.06
  Bottom Layer w30: v1(12385,7485) v1@12390,7485
  Bottom Layer w60: v1(11980,7485) v1(12385,7485)
XTAL101: C101.2 U101.7 Y101.1 | length 366.2
  Bottom Layer w10: U101.7@5488.74,7753.39 5488.74,7793.74 5550,7855 5550,7955 Y101.1@5580,7985 ; C101.2@5546.54,8120 5546.54,8088.46 5575,8060 Y101.1@5575,8035
XTAL102: C103.2 U101.8 Y101.2 | length 701.6
  Bottom Layer w10: U101.8@5520.24,7753.39 5573.39,7753.39 5610,7790 5610,7850 5675,7915 5706.72,7915 5716.72,7925 5800,7925 5885,8010 Y101.2@5997.01,8010 Y101.2@6000,8010 ; Y101.2@5991.54,8041.54 5993.46,8041.54 C103.2@5993.46,8120
XTAL201: C203.2 U201.7 Y201.1 | length 702.7
  Top Layer w10: 5780,5640 5775,5635 5775,5570 5791.26,5553.74 U201.7@5791.26,5473.39
  Top Layer w40: 5780,5640 5780,5765 5905,5890 Y201.1@5957.01,5890 ; Y201.1@5956.54,5896.54 5957.01,5896.54 C203.2@6130,5896.54
XTAL202: C204.2 U201.8 Y201.2 | length 662.5
  Top Layer w20: 5736.61,5473.39 U201.8@5759.76,5473.39
  Top Layer w40: C204.2@5410,5896.54 Y201.2@5578.46,5896.54 ; Y201.2@5582.99,5890 5582.99,5627.01 5730,5480
XTAL301: C317.2 U301.7 Y301.1 | length 783.3
  Bottom Layer w20: 11371.26,6356.26 U301.7@11371.26,6396.61
  Bottom Layer w30: C317.2@10940,5891.54 11113.46,5891.54 11265,6043.07 11265,6252.89 11367.76,6355.65
XTAL302: C318.2 U301.8 Y301.2 | length 483.4
  Bottom Layer w10: 11266.61,6396.61 U301.8@11339.76,6396.61
  Bottom Layer w30: C318.2@10940,6280 11120,6280 11125,6280 11125,6255 11266.61,6396.61
pads on no net: ISP101.0 ISP101.7 ISP201.0 ISP201.7 ISP301.0 ISP301.7 MOS107.3 MOS107.4 MOS107.5 MOS206.3 MOS206.4 MOS206.5 MOS302.3 MOS302.4 MOS302.5 MOS305.3 MOS305.4 MOS305.5 MOS306A.1 MOS306A.2 MOS306A.6 Reg201.4 Reg202.4 Reg305.4 S204.0 T201.0 T201.2 T201.3 U101.13 U101.22 U201.19 U207.3 U207.4 U207.5 U207.6 U207.8 U207.9 U207.10 U207.11 U207.12 U207.13 U301.30 U301.31
copper on no net: | length 203.3
  Top Layer w40: 7140,5295 7140,5240 v1(7120,5220) 7205,5220
  Bottom Layer w40: 7090,5220 v1@7125,5220
  other v1: 7625,4730 7625,4910 7280,5060 7280,5235 7715,5470
  other v2: 11870,7940

## Polygon pours and split planes (outlines as drawn)
GND301 on Top Layer "Top Layer-No Net" (solid, remove dead copper, shelved, pour order 1000): 8680,8440 14190,8440 14190,3950 8680,3950
GND201 on Top Layer "Top Layer-No Net" (solid, shelved, pour order 1000): 5975,3890 5970,3895 5165,3895 5165,3760 5170,3755 5455,3755 5455,3710 5810,3710 5810,3815 5975,3815
VCC201 on Top Layer "Top Layer-No Net" (solid, remove dead copper, shelved, pour order 1001): 4705,6745 6650,6745 6650,3605 4705,3605
GND101A on Top Layer "Top Layer-vcc_led" (solid, remove dead copper, shelved, pour order 1004): 4220,7890 3620,7890 3615,7885 3645,7855 3645,7270
GND101A on Top Layer "Top Layer-vcc_led" (solid, remove dead copper, shelved, pour order 1003): 2965,7190 3750,7190 3750,8005 3715,8040 3675,8000 2960,8000
GND101A on Top Layer "Top Layer-vcc_led" (solid, remove dead copper, shelved, pour order 1002): 2965,7190 3750,7190 3750,8065 2970,8065 2960,8054.65
GND101A on Top Layer "Top Layer-vcc_led" (solid, remove dead copper, shelved, pour order 1001): 2975,7370 2975,8066.22 2491.25,8066.22 2490,8064.98 2490,7892.5
GND101A on Top Layer "Top Layer-vcc_led" (solid, remove dead copper, shelved, pour order 1000): 2490,8090 2490,7895 2495,7890 4220,7890 4220,8090
NetC201_2 on Top Layer "IO board LED VCC" (solid, remove dead copper, shelved, pour order 1000): 7220,8870 7185,8905 7185,9180 7185,9265 7445,9525 7480,9560 7860,9560 7900,9560 8145,9315 8190,9270 8190,8885 8190,8850 8020,8680 7915,8575 7705,8575 7520,8575 7510,8585 7375,8720 7305,8720
VCC201A on Top Layer "I/O board vcc" (solid, remove dead copper, shelved, pour order 1001): 8390,6965 8390,7920 6985,7920 6985,6965
GND201A on Top Layer "I/O board gnd" (solid, remove dead copper, shelved, pour order 1002): 6985,7920 8390,7920 8390,9990 6985,9990
BATTERYSENSE_101B on Top Layer "PSU board vcc" (solid, remove dead copper, shelved, pour order 1003): 4445,9715 4450,9720 6605,9720 6605,8530 4445,8530
GND101 on Top Layer "PSU board gnd" (solid, remove dead copper, shelved, pour order 1000): 4435,8200 6610,8200 6610,7005 4435,7005
GND301 on Bottom Layer "Top Layer-No Net" (solid, remove dead copper, shelved, pour order 1001): 8680,8440 14190,8440 14190,3950 8680,3950
GND201 on Bottom Layer "Top Layer-No Net" (solid, remove dead copper, shelved, pour order 1002): 4705,6745 4705,3605 6650,3605 6650,6745
GND101A on Bottom Layer "bottom layer gnd - led " (solid, remove dead copper, shelved, pour order 1008): 4220,7890 3540,7890 3540,7350 3630,7260 3630,7255
GND101A on Bottom Layer "bottom layer gnd - led " (solid, remove dead copper, shelved, pour order 1007): 3750,7190 2965,7190 2960,7195 2960,7945 3750,7945
GND101A on Bottom Layer "bottom layer gnd - led " (solid, remove dead copper, shelved, pour order 1006): 2490.04,7890.04 2490,7890.08 2490,8090 4220,8090 4220,7890
GND101A on Bottom Layer "bottom layer gnd - led " (solid, remove dead copper, shelved, pour order 1005): 2960,7380 2970,7390 2970,7985 2585,7985 2490,7890
GND101B on Bottom Layer "PSU board gnd" (solid, remove dead copper, shelved, pour order 1005): 4440,9715 6600,9715 6605,9720 6605,8530 4445,8530 4440,8535
VCC101 on Bottom Layer "PSU board gnd" (solid, remove dead copper, shelved, pour order 1001): 4435,8200 6610,8200 6610,7005 4435,7005
GND201A on Bottom Layer "I/O board gnd" (solid, remove dead copper, shelved, pour order 1004): 8390,9990 6985,9990 6985,6970 8385,6970 8390,6965

## Keep-outs
Keep-Out Layer:
  circle w10: c8005,6585 r128
  circle w10: c8005,3765 r128
  circle w10: c4865,6585 r128
  circle w10: c4865,3765 r128

## Silkscreen, mask and mechanical layers (free items; w line width, h text height)
Top Overlay:
  circle w10: c2396.34,2390 r944.88
  circle w10: c2396.34,2390 r708.66
  circle w10: c4401.34,2395 r708.66
  circle w10: c4401.34,2395 r944.88
  circle w10: c9475,5675 r787.4
  circle w10: c11425,5675 r787.4
  circle w10: c13375,5675 r787.4
Mechanical 15:
  circle w10: c3745,9140 r295.28
  circle w10: c3745,9140 r492.13
  circle w1: c3400,9330 r90.94
  circle w1: c4090,8950 r90.94
  circle w1: c3555,8795 r90.94
  circle w10: c2450,9085 r295.28
  circle w10: c2450,9085 r492.13
  circle w1: c2105,9275 r90.94
  circle w1: c2795,8895 r90.94
  circle w1: c2260,8740 r90.94
  circle w10: c13090,2415 r295.28
  circle w10: c13090,2415 r492.13
  circle w1: c12745,2605 r90.94
  circle w1: c13435,2225 r90.94
  circle w1: c12900,2070 r90.94
  circle w10: c11940,2435 r295.28
  circle w10: c11940,2435 r492.13
  circle w1: c11595,2625 r90.94
  circle w1: c12285,2245 r90.94
  circle w1: c11750,2090 r90.94
  circle w10: c10830,2445 r295.28
  circle w10: c10830,2445 r492.13
  circle w1: c10485,2635 r90.94
  circle w1: c11175,2255 r90.94
  circle w1: c10640,2100 r90.94
  circle w10: c9665,2435 r295.28
  circle w10: c9665,2435 r492.13
  circle w1: c9320,2625 r90.94
  circle w1: c10010,2245 r90.94
  circle w1: c9475,2090 r90.94
  circle w10: c8505,2430 r295.28
  circle w10: c8505,2430 r492.13
  circle w1: c8160,2620 r90.94
  circle w1: c8850,2240 r90.94
  circle w1: c8315,2085 r90.94
  circle w10: c7290,2435 r295.28
  circle w10: c7290,2435 r492.13
  circle w1: c6945,2625 r90.94
  circle w1: c7635,2245 r90.94
  circle w1: c7100,2090 r90.94
  circle w1: c5960,2080 r90.94
  circle w1: c6495,2235 r90.94
  circle w1: c5805,2615 r90.94
  circle w10: c6150,2425 r492.13
  circle w10: c6150,2425 r295.28
  rectangle: 6655,4420 7085,6755
  lines w3.94: 2962.44,7186.34 2962.44,7383.19 2490,7895 ; 3749.84,7186.34 3749.84,7383.19 4222.28,7895 ; 2490,7895 2490,8091.85 4222.28,8091.85 4222.28,7186.34 2490,7186.34 2490,7895
  lines w10: 4700,6750 4700,3600 8170,3600 ; 4705,6750 8169.57,6750 ; 6606.1,7011.61 6606.1,8195 4441.1,8195 4441.1,7011.61 6606.46,7011.61 ; 6606.1,8536.61 6606.1,9720 4441.1,9720 4441.1,8536.61 6606.46,8536.61 ; 6654,3605 6654,6754.61 ; 6979.57,6961.1 6979.57,9995 ; 6980,6961.1 8396.89,6961.1 8396.89,9993.11 8395,9995 6980,9995 ; 6980,8142.2 8400,8142.2 ; 8170,3600.39 8170,6750 ; 8675,3950 14187,3950 ; 8680,3953 8680,8435 ; 8750,6973 14262,6973 ; 10958.56,3950 cw(c11431,3950) 11903.44,3950 ; 10958.56,8435 ccw(c11431,8435) 11903.44,8435 ; 14190,3953 14190,8435

## Text inside footprints (layer, text, board x,y; h text height)
BT201: Top Overlay "+" at 5397.72,4085.51 h45.28 r90
Opt_Rx_201: Top Overlay "+" at 6465.2,5683.15 h31.5 r90; Top Overlay "-" at 6465.2,5521.73 h31.5 r90; Top Overlay "O" at 6469.13,5360.31 h31.5 r90
Opt_Tx_201: Top Overlay "+" at 6329.13,5525.67 h31.5 r90; Top Overlay "-" at 6337.01,5687.09 h31.5 r90; Top Overlay "In" at 6329.13,5360.31 h31.5 r90
OptRx101: Bottom Overlay "+" at 4676.85,7874.8 h31.5; Bottom Overlay "-" at 4838.27,7874.8 h31.5; Bottom Overlay "O" at 4999.69,7870.87 h31.5
OptTx101: Bottom Overlay "+" at 4834.33,8010.87 h31.5; Bottom Overlay "-" at 4672.91,8002.99 h31.5; Bottom Overlay "In" at 4999.69,8010.87 h31.5